# Altium PCB suiveur_de_ligne.PcbDoc
Units mil, origin at the board's own origin, x right, y up, seen from the top; angles counter-clockwise.
Board outline 6000 x 4000 mil, 2 copper layers (Top Layer, Bottom Layer); 16 components, 8 nets, 54 pads, 1 vias.
Unrouted connection lines stored in the file: 37.
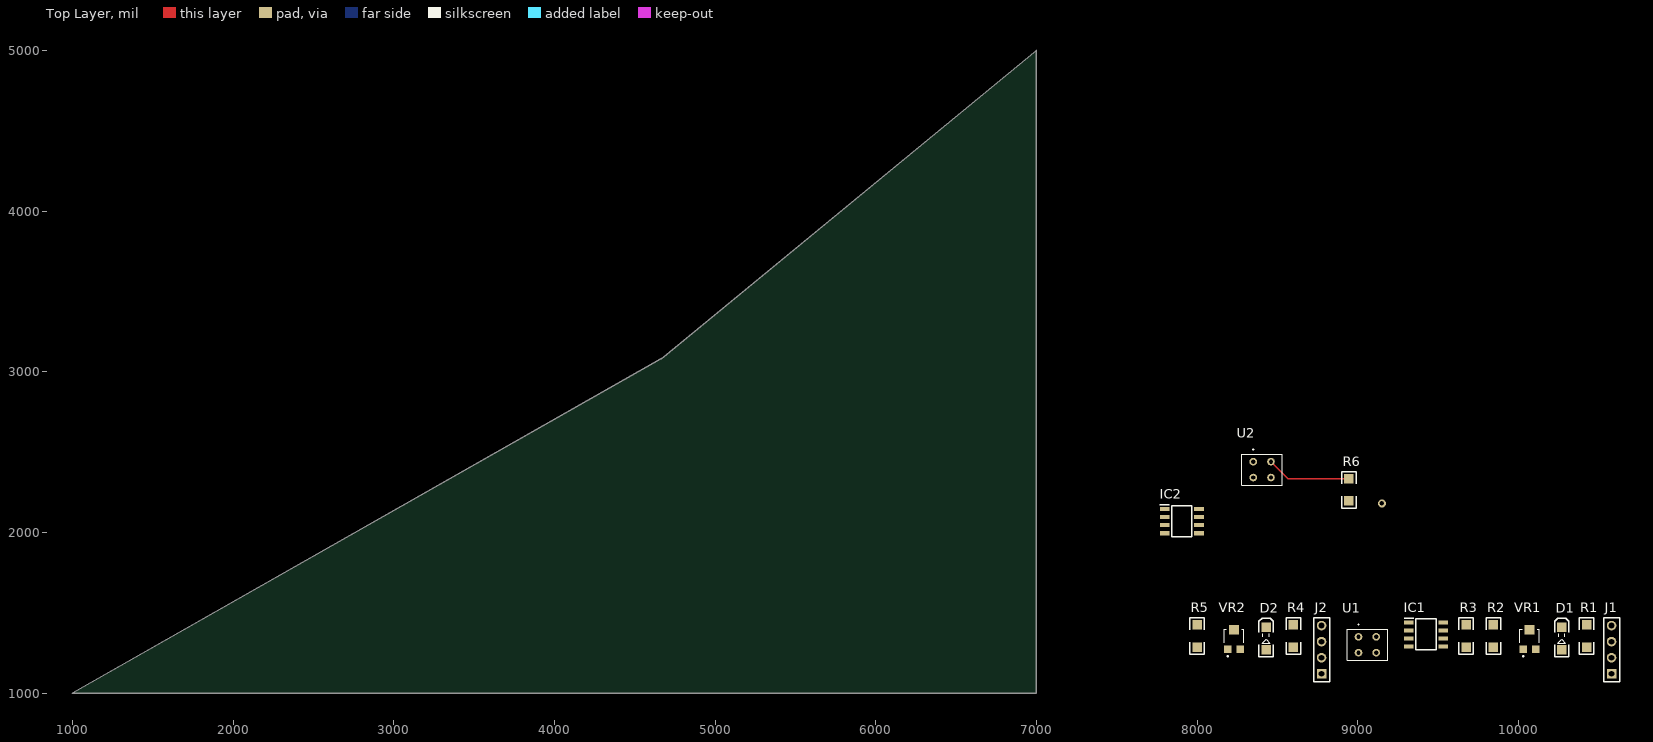
[diagram p0: Top Layer view]
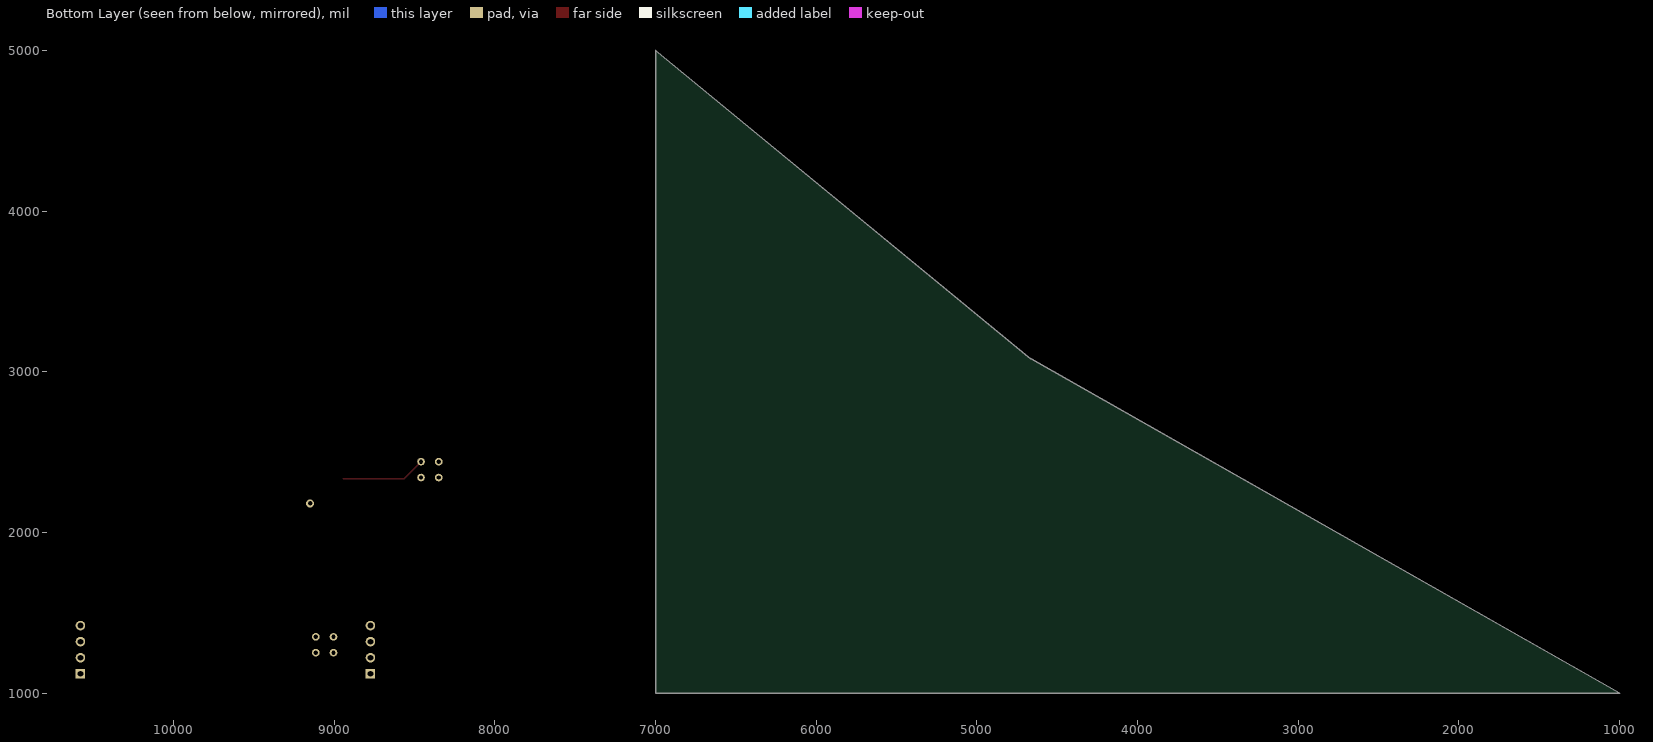
[diagram p1: Bottom Layer view, seen from below]

## Layer stack, top to bottom
Top Solder: solder mask 0.4, Solder Resist, Dk 3.5
Top Layer: signal copper 1.4
Dielectric 1: dielectric 12.6, FR-4, Dk 4.8
Bottom Layer: signal copper 1.4
Bottom Solder: solder mask 0.4, Solder Resist, Dk 3.5

## Board outline
1000,1000 7000,1000 7000,5000 4665,3080

## Design rules (kind name [scope] priority, off if disabled: settings)
Clearance [All] p1: gap=10 ignorepadtopadclearanceinfootprint=FALSE except(0: Arc-Hole Track-Hole SMDPad-Hole THPad-Hole Via-Hole Fill-Hole Poly-Hole Region-Hole Text-Hole)
PolygonConnect [All] p1: connectstyle=Relief reliefconductorwidth=10 reliefentries=4 polygonreliefangle="90 Angle" airgapwidth=10
RoutingVias [All] p1: holewidth=28 width=50 viastyle="Through Hole" minholewidth=28 minwidth=50 maxholewidth=28 maxwidth=50
SolderMaskExpansion [All] p1: expansion=4 istentingtop=FALSE
Width [All] p1: maxlimit=10 minlimit=10 preferedwidth=10
30 further rules are at their usual default settings.

## Components (designator, comment, footprint, x,y, rotation, side; value= is the part's Value field where it differs from the comment)
D1 "LED1" KP-3216SEC 10270,1340 r90 top
D2 "LED1" KP-3216SEC 8430,1340 r90 top
IC1 "LM358AWDT" SOIC127P600X175-8N 9425,1365 r0 top
IC2 "LM358AWDT" SOIC127P600X175-8N 7905,2070 r0 top
J1 "Header 4" HDR1X4 10580,1120 r90 top
J2 "Header 4" HDR1X4 8775,1120 r90 top
R1 "" "Resistor 1206" 10425,1355 r90 top value=10K
R2 "" "Resistor 1206" 9845,1355 r90 top value=100
R3 "" "Resistor 1206" 9675,1355 r90 top value=22K
R4 "" "Resistor 1206" 8600,1355 r90 top value=10K
R5 "" "Resistor 1206" 8000,1355 r90 top value=100
R6 "" "Resistor 1206" 8945,2265 r90 top value=22K
U1 "RPR-220PC30N" RPR220PC30N 9005,1350 r0 top
U2 "RPR-220PC30N" RPR220PC30N 8350,2440 r0 top
VR1 "EVM-3YSX50B53" EVM3YSX50B53 10070,1340 r0 top
VR2 "EVM-3YSX50B53" EVM3YSX50B53 8230,1340 r0 top

## Footprints (in the part's own frame and the unit in brackets; to place one, negate y for a bottom-side part, rotate by r counter-clockwise, add the part's x,y. Pads: shape width x height; smd on the part's side, far side on the other; paste and mask are expansions set on the pad)
EVM3YSX50B53 [mm]
  rect 1.2x1.2 smd: A1(-1,-1.7) C1(1,-1.7)
  rect 1.6x1.5 smd: B1(0,1.4)
  silkscreen extent -1.55,-2.9 1.55,1.45, body extent -1.55,-2.18 1.55,2, height 1.65
HDR1X4 [mm] "Connector; Header; 4 Position"
  rect 1.5x1.5 hole 0.9: 1(0,0)
  round 1.5 hole 0.9: 2(2.54,0) 3(5.08,0) 4(7.62,0)
  silkscreen extent -1.27,-1.27 8.89,1.27
KP-3216SEC [mm]
  rect 1.5x1.5 smd: 1(-1.75,0) 2(1.75,0)
  silkscreen extent -2.89,-1.14 3.2,1.14, body extent -1.7,-0.79 1.5,0.81, height 1.1
"Resistor 1206" [mm]
  rect 1.5x1.5 smd: 1(-1.75,0) 2(1.75,0)
  silkscreen extent -2.89,-1.14 2.89,1.14, body extent -1.98,-0.95 1.98,0.93, height 0.55
RPR220PC30N [mm]
  round 1.2 hole 0.7: 1(0,0) 2(0,-2.5) 3(2.8,-2.5) 4(2.8,0)
  silkscreen extent -1.8,-3.7 4.6,2, body extent -1.8,-3.7 4.6,1.2, height 6.6
SOIC127P600X175-8N [mm]
  rect 1.525x0.65 smd: 1(-2.712,1.905) 2(-2.712,0.635) 3(-2.712,-0.635) 4(-2.712,-1.905) 5(2.712,-1.905) 6(2.712,-0.635) 7(2.712,0.635) 8(2.712,1.905)
  silkscreen extent -3.47,-2.45 1.6,2.58, body extent -3,-2.45 3,2.45, height 1.75

## Part data
D1 D2: "Typical RED GaAs LED", LatestRevisionDate=08-Jul-2005, LatestRevisionNote="Mech Layer 1 removed.", PackageDescription="LED; 2 Leads", PackageReference=LED-1, Published=8-Jun-2000, Publisher="Altium Limited"
IC1 IC2: "Integrated Circuit", Manufacturer_Name=STMicroelectronics, Mouser Part Number=511-LM358AWDT, Arrow Part Number=LM358AWDT, Arrow Price/Stock=https://www.arrow.com/en/products/lm358awdt/stmicroelectronics?region=nac, Datasheet Link=https://www.st.com/resource/en/datasheet/lm158w.pdf, Height=1.75mm, Manufacturer_Part_Number=LM358AWDT, Mouser Price/Stock=https://www.mouser.co.uk/ProductDetail/STMicroelectronics/LM358AWDT?qs=Ok1pvOkw6%2FqiXfQzFpuZ5Q%3D%3D
R1 R2 R3 R4 R5 R6: library part Res2, "Resistor", LatestRevisionDate=17-Jul-2002, LatestRevisionNote="Re-released for DXP Platform.", PackageDescription="Axial Device, Thru-Hole; 2 Leads; 0.4 in Pin Spacing", PackageReference=AXIAL-0.4, Published=8-Jun-2000, Publisher="Altium Limited"
U1 U2: "Undefined or Miscellaneous", Manufacturer_Name="ROHM Semiconductor", Mouser Part Number=755-RPR-220PC30N, Arrow Part Number=RPR-220PC30N, Arrow Price/Stock=https://www.arrow.com/en/products/rpr-220pc30n/rohm-semiconductor, Datasheet Link=http://rohmfs.rohm.com/en/products/databook/datasheet/opto/optical_sensor/photosensor/rpr-220pc30n.pdf, Height=6.5mm, Manufacturer_Part_Number=RPR-220PC30N, Mouser Price/Stock=https://www.mouser.co.uk/ProductDetail/ROHM-Semiconductor/RPR-220PC30N?qs=U%2FDGNQcZ28ppQpuQ5bm7oA%3D%3D
VR1 VR2: "Variable Resistor", Manufacturer_Name=Panasonic, Mouser Part Number=667-EVM-3YSX50B53, Arrow Part Number=EVM-3YSX50B53, Arrow Price/Stock=https://www.arrow.com/en/products/evm-3ysx50b53/panasonic, Datasheet Link=https://datasheet.datasheetarchive.com/originals/distributors/Datasheets_SAMA/06485c698e59114aa7d87e0e45252d0d.pdf, Height=1.55mm, Manufacturer_Part_Number=EVM-3YSX50B53, Mouser Price/Stock=https://www.mouser.com/Search/Refine.aspx?Keyword=667-EVM-3YSX50B53
J1 J2: LatestRevisionDate=17-Jul-2002, LatestRevisionNote="Re-released for DXP Platform.", Publisher="Altium Limited"

## Via types
v1: diameter 50, hole 28, Top Layer to Bottom Layer, 1 vias

## Nets (pads, with @x,y where several pads share a name; then routed paths per layer and width w, separated by ;. In a path a pad name is that pad's centre, name@x,y a point inside that pad or via, vN(x,y) a via of type N, cw(c..) or ccw(c..) an arc to the next point about the centre after c; other vN are vias at no path point)
GND: IC1.4 IC2.4 J1.4 J2.4 U1.1 U1.3 U2.1 U2.3 VR1.C1 VR2.C1
NetD1_1: D1.1 R1.1
NetD1_2: D1.2 IC1.1 J1.1
NetD2_1: D2.1 R4.1
NetD2_2: D2.2 IC2.1 J2.1
NetR2_1: R2.1 U1.2
NetR5_1: R5.1 U2.2
VCC: IC1.2 IC1.3 IC1.8 IC2.2 IC2.3 IC2.8 J1.3 J2.3 R1.2 R2.2 R3.1 R3.2 R4.2 R5.2 R6.1 R6.2 U1.4 U2.4 VR1.A1 VR1.B1 VR2.A1 VR2.B1 | length 528.7
  Top Layer w10: U2.4 8566.34,2333.9 R6.2
pads on no net: IC1.5 IC1.6 IC1.7 IC2.5 IC2.6 IC2.7 J1.2 J2.2
copper on no net:
  other v1: 9150,2180